# Altium PCB ESP32W_Zzed.PcbDoc (part 2 of 2)
Units mil, origin at the board's own origin, x right, y up, seen from the top; angles counter-clockwise.
Board outline 1900 x 1100 mil, 4 copper layers (Top Layer, Int1 (GND), Int2 (PWR), Bottom Layer), stack 53.912 mil thick; 65 components, 66 nets, 305 pads, 82 vias.
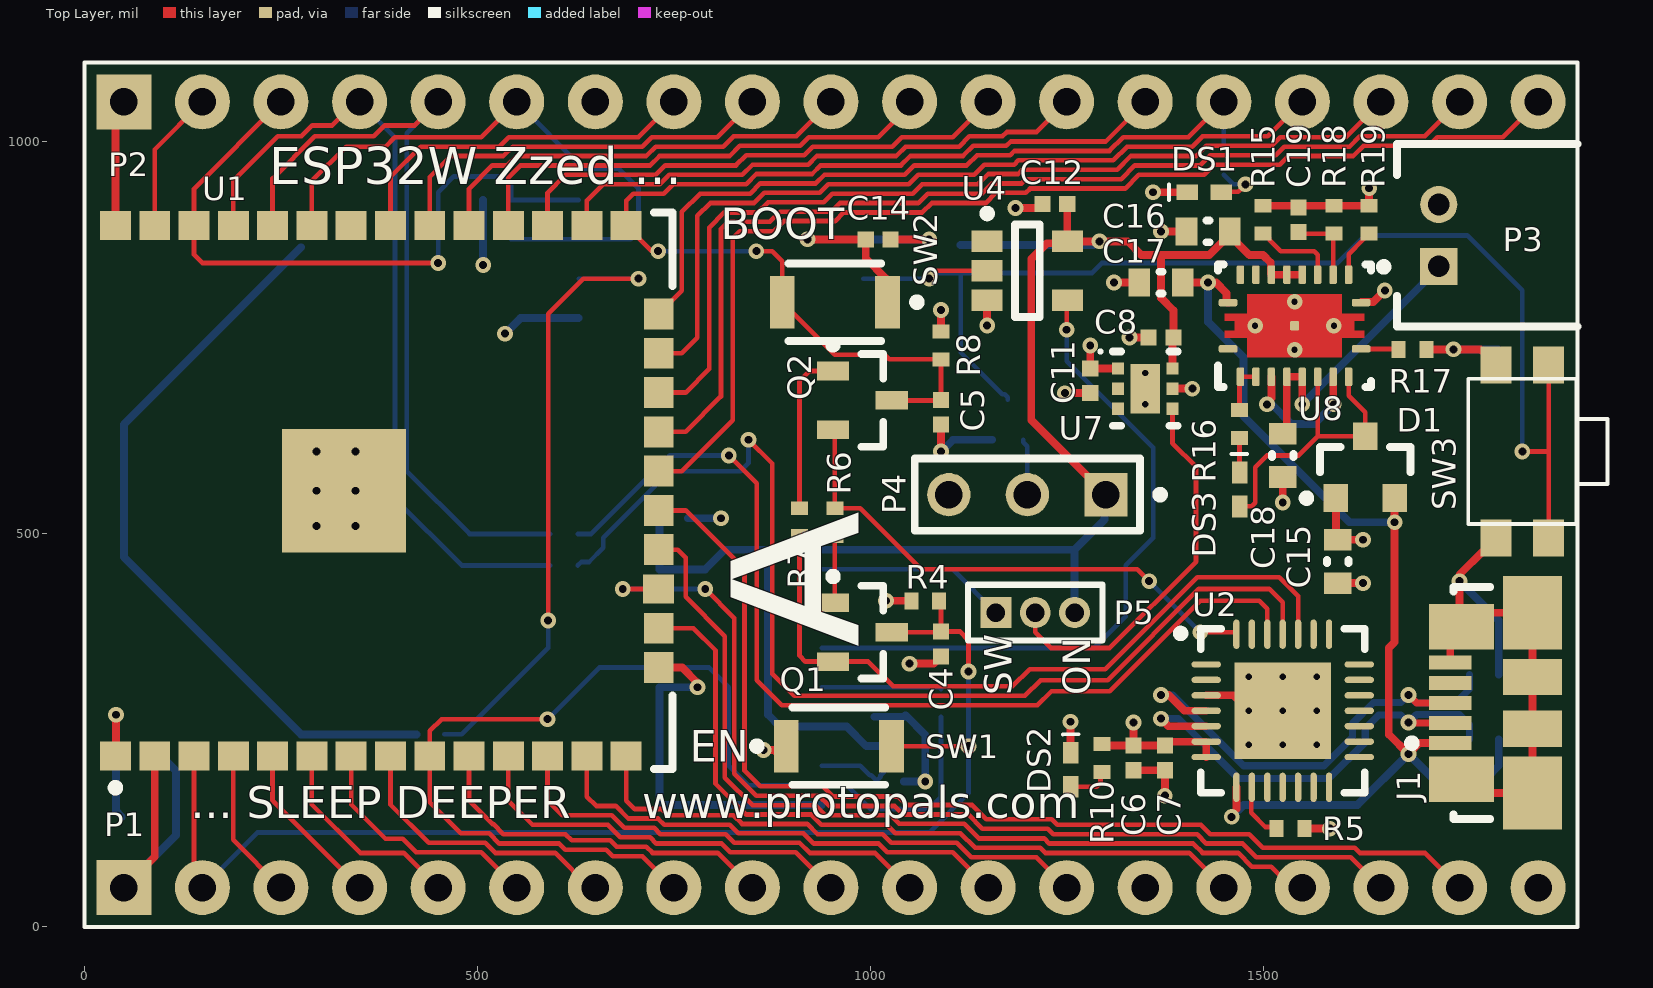
[diagram p0: Top Layer view]

## Silkscreen, mask and mechanical layers (free items; w line width, h text height)
Top Overlay:
  lines w5: 1900,0 1900,1100
  text "ESP32W Zzed ..." at 235,930 h80
  text "BOOT" at 810,875 h40
  text "A" at 1080,355 h500 r90
  text "SW" at 1180,295 h35 r90
  text "ON" at 1280,295 h35 r90
  text "EN" at 770,210 h40
  text "... SLEEP DEEPER" at 135,125 h70
  text "www.protopals.com" at 710,125 h70
Bottom Overlay:
  text "1225" at 20,685 h40 r270
  text "1220" at 20,290 h40 r270
  text "VER1" at 1544.94,165 h70
Mechanical 1:
  the board outline again, w5
Board Outline:
  lines w5: 0,0 0,1100 5,1100 1900,1100 1900,0 0,0

## Text inside footprints (layer, text, board x,y; h text height)
J1: Mechanical 6 "PCB EDGE" at 1904.17,1.54 h11.81 r90